# Altium PCB HnWrist.PcbDoc
Units mil, origin at the board's own origin, x right, y up, seen from the top; angles counter-clockwise.
Board outline 1130 x 1625 mil, 2 copper layers (Top Layer, Bottom Layer); 73 components, 55 nets, 292 pads, 87 vias.
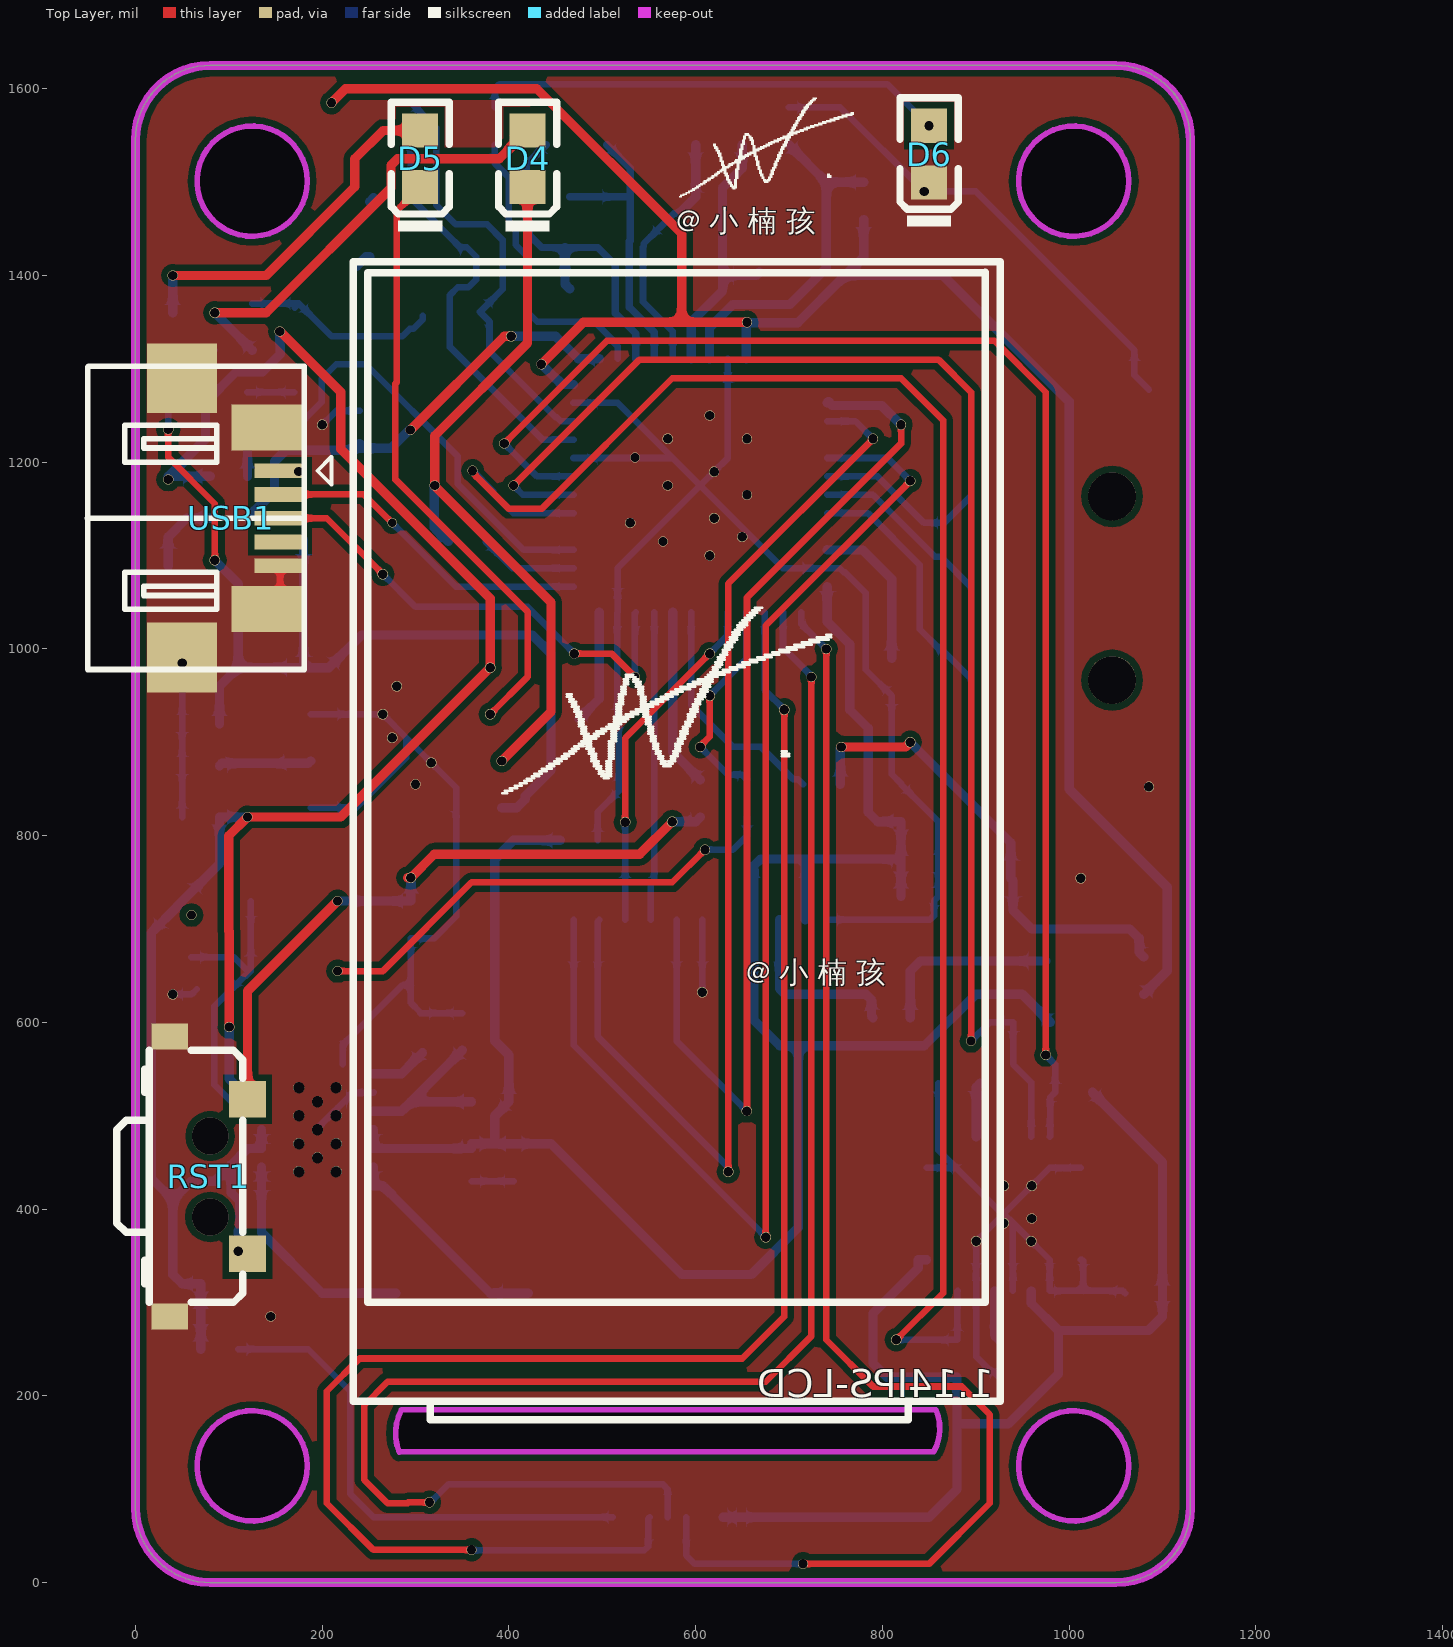
[diagram p0: Top Layer view]
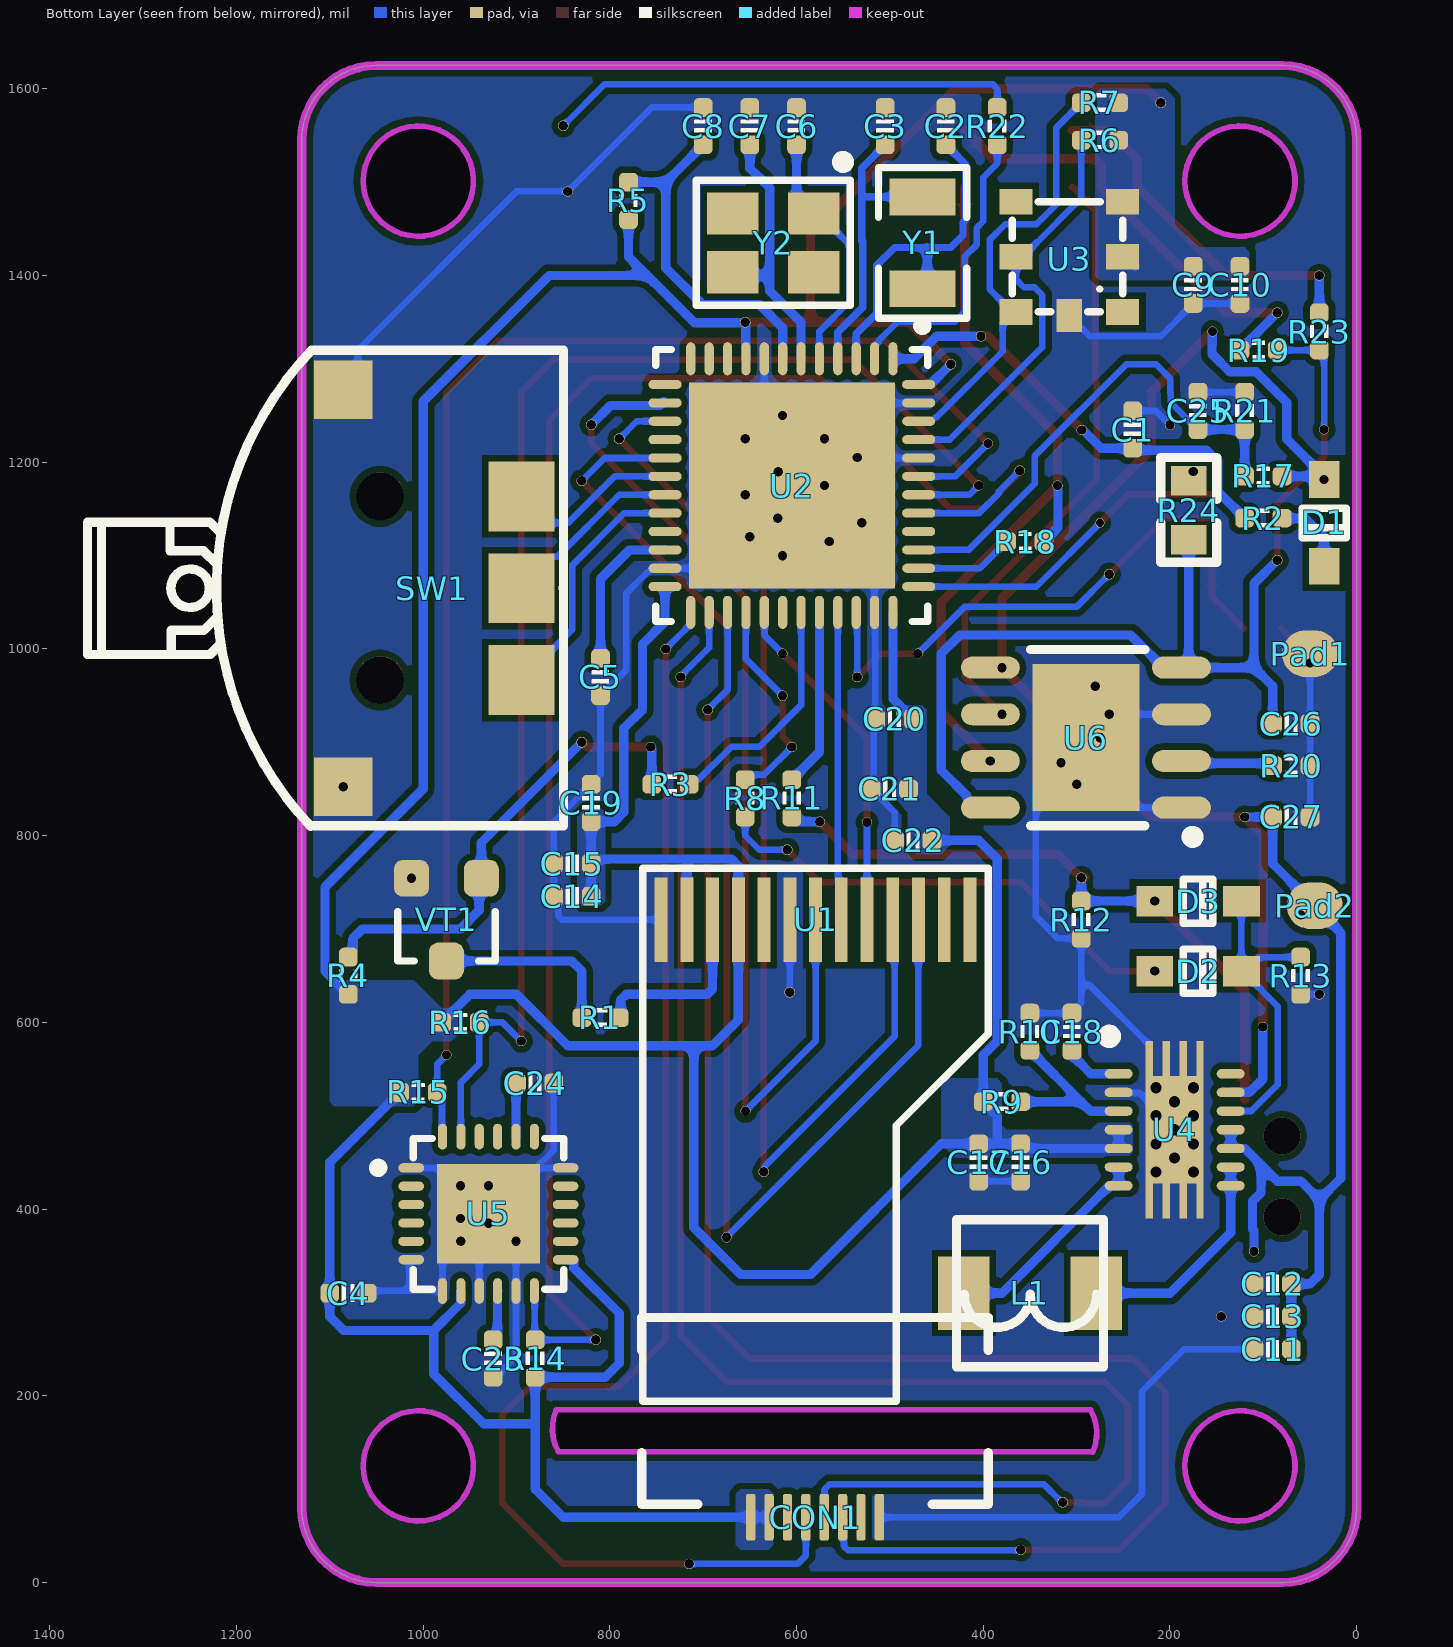
[diagram p1: Bottom Layer view, seen from below]
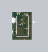
[diagram p2: 3D render of the assembled board from above, using the file's embedded part models]
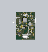
[diagram p3: 3D render of the assembled board from below, using the file's embedded part models]

## Layer stack, top to bottom
Top Solder: solder mask 0.4, Solder Resist, Dk 3.5
Top Layer: signal copper 1.4
Dielectric 1: dielectric 12.6, FR-4, Dk 4.8
Bottom Layer: signal copper 1.4
Bottom Solder: solder mask 0.4, Solder Resist, Dk 3.5

## Board outline
0,80 ccw(c80,80) 80,0 1050,0 ccw(c1050,80) 1130,80 1130,1545 ccw(c1050,1545) 1050,1625 80,1625 ccw(c80,1545) 0,1545
cut-out: 65.94,125 ccw(c125,125) 125,65.94 ccw(c125,125) 184.06,125 ccw(c125,125) 125,184.06 ccw(c125,125)
cut-out: 945.94,1501.06 ccw(c1005,1501.06) 1005,1442.01 ccw(c1005,1501.06) 1064.06,1501.06 ccw(c1005,1501.06) 1005,1560.12 ccw(c1005,1501.06)
cut-out: 125,1442.01 cw(c125,1501.06) 65.94,1501.06 cw(c125,1501.06) 125,1560.12 cw(c125,1501.06) 184.06,1501.06 cw(c125,1501.06)
cut-out: 945.94,125 ccw(c1005,125) 1005,65.94 ccw(c1005,125) 1064.06,125 ccw(c1005,125) 1005,184.06 ccw(c1005,125)
cut-out: 282.63,139.86 cw(c330,160) 285,185 855,185 857.37,185.14 cw(c810,165) 855,140
cut-out: 285,185 857.23,185 857.37,185.14

## Design rules (kind name [scope] priority, off if disabled: settings)
Clearance [All] p1: gap=7 ignorepadtopadclearanceinfootprint=FALSE except(0: Arc-Hole Track-Hole SMDPad-Hole THPad-Hole Via-Hole Fill-Hole Poly-Hole Region-Hole Text-Hole)
HoleSize [All] p1: absolutevalues=TRUE maxlimit=200 minlimit=12 maxpercent=80.000 minpercent=20.000
HoleToHoleClearance [All] p1: gap=12 allowstackedmicrovias=TRUE
MinimumSolderMaskSliver [All] p1: minsoldermaskwidth=12
PlaneConnect [All] p1: planeconnectstyle=Direct reliefexpansion=20 reliefentries=4 reliefconductorwidth=10 reliefairgap=10
PolygonConnect [All] p1: connectstyle=Direct reliefconductorwidth=10 reliefentries=4 polygonreliefangle="90 Angle" airgapwidth=10
RoutingVias [All] p1: holewidth=12 width=13 viastyle="Through Hole" minholewidth=12 minwidth=12 maxholewidth=200 maxwidth=200
SolderMaskExpansion [All] p1: expansion=4 istentingtop=FALSE
Width [All] p1: maxlimit=100 minlimit=7 preferedwidth=8
26 further rules are at their usual default settings.

## Classes and differential pairs
net class GND: GND
net class PWR: 3V3 BAT BAT_CHG BAT_DET USB_VCC

## Components (designator, comment, footprint, x,y, rotation, side; value= is the part's Value field where it differs from the comment)
C1 "104" CAP_0402 240,1235 r270 bottom value=0.1u
C2 "22pF" CAP_0402 440,1560 r270 bottom value=0.1u
C3 "22pF" CAP_0402 505,1560 r270 bottom value=0.1u
C4 "1uF" CAP_0402 1080,310 r0 bottom value=0.1u
C5 "4.7uF" CAP_0402 810,970 r90 bottom value=0.1u
C6 "22pF" CAP_0402 600,1560 r270 bottom value=0.1u
C7 "22pF" CAP_0402 650,1560 r270 bottom value=0.1u
C8 "104" CAP_0402 700,1560 r270 bottom value=0.1u
C9 "4.7uF" CAP_0402 175,1390 r90 bottom value=0.1u
C10 "104" CAP_0402 125,1390 r90 bottom value=0.1u
C11 "106" CAP_0402 90,250 r0 bottom value=0.1u
C12 "106" CAP_0402 90,320 r0 bottom value=0.1u
C13 "106" CAP_0402 90,285 r0 bottom value=0.1u
C14 "106" CAP_0402 840,735 r0 bottom value=0.1u
C15 "22uF" CAP_0402 840,770 r0 bottom value=0.1u
C16 "22uF" CAP_0402 360,450 r270 bottom value=0.1u
C17 "104" CAP_0402 405,450 r270 bottom value=0.1u
C18 "104" CAP_0402 305,590 r270 bottom value=0.1u
C19 "1uF" CAP_0402 820,835 r90 bottom value=0.1u
C20 "1uF" CAP_0402 495,925 r180 bottom value=0.1u
C21 "1uF" CAP_0402 500,850 r180 bottom value=0.1u
C22 "1uF" CAP_0402 475,795 r0 bottom value=0.1u
C23 "104" CAP_0402 925,240 r90 bottom value=0.1u
C24 "2.2nF" CAP_0402 880,535 r0 bottom value=0.1u
C25 "104" CAP_0402 170,1255 r90 bottom value=0.1u
C26 "106" CAP_0402 70,920 r0 bottom value=0.1u
C27 "106" CAP_0402 70,820 r0 bottom value=0.1u
CON1 "MAX30102" FFC_0.5_8 580.16,159 r0 bottom
D1 "1N4148" LC-SOD-323 35,1135 r90 bottom
D2 "1N4148" LC-SOD-323 170,655 r0 bottom
D3 "1N4148" LC-SOD-323 170,730 r0 bottom
D4 "红灯 0603" LC-0603_LED_S1 420,1525 r90 top
D5 "绿灯 0603" LC-0603_LED_S1 305,1525 r90 top
D6 "红灯 0603" LC-0603_LED_S1 850,1530 r90 top
L1 "1.5uH" 变压器电感_0420 350,310 r90 bottom locked
Pad1 "BAT" PAD_A 50,995 r180 bottom
Pad2 "BAT" PAD_A 45,725 r180 bottom
R1 "10R" RES_0402 810,605 r0 bottom value=22R
R2 "10K" RES_0402 100,1140 r180 bottom value=22R
R3 "1K" RES_0402 735,855 r180 bottom value=22R
R4 "20K" RES_0402 1080,650 r270 bottom value=22R
R5 "47K" RES_0402 780,1480 r270 bottom value=22R
R6 "4.7K" RES_0402 275,1545 r180 bottom value=22R
R7 "4.7K" RES_0402 275,1585 r180 bottom value=22R
R8 "4.7K" RES_0402 655,840 r90 bottom value=22R
R9 "1M" RES_0402 380,515 r180 bottom value=22R
R10 "180K" RES_0402 350,590 r90 bottom value=22R
R11 "20K" RES_0402 605,840 r270 bottom value=22R
R12 "20K" RES_0402 295,710 r270 bottom value=22R
R13 "1M" RES_0402 60,650 r270 bottom value=22R
R14 "10K" RES_0402 880,240 r270 bottom value=22R
R15 "10K" RES_0402 1005,525 r0 bottom value=22R
R16 "10K" RES_0402 960,600 r0 bottom value=22R
R17 "20K" RES_0402 100,1185 r0 bottom value=22R
R18 "2K" RES_0402 355,1115 r180 bottom value=22R
R19 "2K" RES_0402 105,1320 r180 bottom value=22R
R20 "2K" RES_0402 70,875 r180 bottom value=22R
R21 "20K" RES_0402 120,1255 r90 bottom value=22R
R22 "1K" RES_0402 385,1560 r90 bottom value=22R
R23 "10K" RES_0402 40,1340 r90 bottom value=22R
R24 "0R" 0603R 180,1180 r270 bottom value=22R
RST1 "KEY" 侧面按键3*6*3.5 80,435 r90 top locked
SW1 "三档拨轮开关" SW-SMD 990,1065 r90 bottom locked
U1 "IPS-LCD" 1.14IPS-LCD 1256.81,446.22 r270 top locked
U2 "STM32F401CCU6" STM-UFQFPN48_N 605,1175 r270 bottom locked
U3 "BMP180" LGA-7 447.68,1321.57 r270 bottom locked
U4 "TPS63020" TPS63020 195,485 r270 bottom locked
U5 "MPU6050" QFN-24 930,395 r180 bottom
U6 "TP4056" LC-SOP-8_EP_150MIL 290,905 r90 bottom
USB1 "Micro-USB" USB-MICRO_A 155,1191 r270 top locked
VT1 "S8050" SMT_TRIODE_NPN 975,710 r0 bottom
Y1 "32.768KHz" "LC-SMD-3215_2P FC - 135" 465,1435 r90 bottom
Y2 "25MHZ" LC-SMD-3225_4P 625,1435 r0 bottom locked

## Footprints (in the part's own frame and the unit in brackets; to place one, negate y for a bottom-side part, rotate by r counter-clockwise, add the part's x,y. Pads: shape width x height; smd on the part's side, far side on the other; paste and mask are expansions set on the pad)
1.14IPS-LCD [mm] "1.14寸IPS-LCD裸屏SPI接口"
  rect 2.3x0.35 smd far side: 1(-6.7,-21.4) 2(-6.7,-20.7) 3(-6.7,-20) 4(-6.7,-19.3) 5(-6.7,-18.6) 6(-6.7,-17.9) 7(-6.7,-17.2) 8(-6.7,-16.5) 9(-6.7,-15.8) 10(-6.7,-15.1) 11(-6.7,-14.4) 12(-6.7,-13.7) 13(-6.7,-13)
  silkscreen extent -24.6,-26 6.9,-8.4
0603R [mm]
  rect 0.8x0.965 smd: 1(0,0) 2(1.6,0)
  silkscreen extent -0.64,-0.76 2.21,0.76, body extent -0.04,-0.41 1.56,0.41, height 0.45
CAP_0402 [mil]
  rrect50% 20x20 smd: 1(-20,0) 2(20,0)
  silkscreen extent -7,-9 7,9, body extent -20,-10 20,10, height 20
FFC_0.5_8 [mil]
  rrect50% 10x50 smd: 1(-68.9,89) 2(-49.21,89) 3(-29.53,89) 4(-9.84,89) 5(9.84,89) 6(29.53,89) 7(49.21,89) 8(68.9,89)
  silkscreen extent -186,-125 186,75, body extent -187,-124 187,87, height 82
LC-0603_LED_S1 [mm]
  rect 0.93x0.98 smd: A(0.77,0) K(-0.77,0)
  silkscreen extent -1.97,-0.79 1.54,0.79, body extent -0.8,-0.4 0.8,0.4, height 0.6
"LC-SMD-3215_2P FC - 135" [mm]
  rect 1x1.8 smd: 1(-1.25,0) 2(1.25,0)
  silkscreen extent -2.05,-1.2 2.05,1.2
LC-SMD-3225_4P [mm]
  rect 1.4x1.15 smd: 1(-1.1,-0.8) 2(1.1,-0.8) 3(1.1,0.8) 4(-1.1,0.8)
  silkscreen extent -2.1,-2.35 2.1,1.7, body extent -1.6,-1.25 1.6,1.25, height 0.61
LC-SOD-323 [mm]
  rect 1x0.83 smd: 1(1.18,0) 2(-1.18,0)
  silkscreen extent -0.4,-0.6 0.4,0.6, body extent -1.35,-0.63 1.35,0.63, height 1.1
LC-SOP-8_EP_150MIL [mm]
  rect 4x2.9 smd: 0(0,0)
  oval 0.6x1.6 smd: 1(-1.905,-2.6) 2(-0.635,-2.6) 3(0.635,-2.6) 4(1.905,-2.6) 5(1.905,2.6) 6(0.635,2.6) 7(-0.635,2.6) 8(-1.905,2.6)
  silkscreen extent -2.85,-3.05 2.4,1.5
LGA-7 [mm] "LGA-7Pin"
  rect 0.7x0.9 smd: 1(-1,5) 2(-2.5,5) 3(-4,5) 4(-4,2.1) 5(-2.5,2.1) 6(-1,2.1)
  rect 0.9x0.7 smd: 7(-0.9,3.55)
  silkscreen extent -4,2 -1,5
PAD_A [mil]
  oval 60x50 smd: 1(0,0)
QFN-24 [mm]
  oval 0.7x0.25 smd: 1(-2.1,1.25) 2(-2.1,0.75) 3(-2.1,0.25) 4(-2.1,-0.25) 5(-2.1,-0.75) 6(-2.1,-1.25) 13(2.1,-1.25) 14(2.1,-0.75) 15(2.1,-0.25) 16(2.1,0.25) 17(2.1,0.75) 18(2.1,1.25)
  oval 0.25x0.7 smd: 7(-1.25,-2.1) 8(-0.75,-2.1) 9(-0.25,-2.1) 10(0.25,-2.1) 11(0.75,-2.1) 12(1.25,-2.1) 19(1.25,2.1) 20(0.75,2.1) 21(0.25,2.1) 22(-0.25,2.1) 23(-0.75,2.1) 24(-1.25,2.1)
  rect 2.8x2.7 smd: ""(0,0)
  silkscreen extent -3.13,-2.05 2.05,2.05, body extent -2.02,-2.02 2.02,2.02, height 0.95
RES_0402 [mil]
  rrect50% 20x20 smd: 1(-20,0) 2(20,0)
  silkscreen extent -6,-10 6,10, body extent -20,-10 20,10, height 14
SMT_TRIODE_NPN [mm]
  rrect50% 0.95x1 smd: 1(-0.95,-1.125) 2(0.95,-1.125) 3(0,1.125)
  silkscreen extent -1.33,-0.22 1.32,1.13, body extent -1.45,-1.4 1.45,1.4, height 1.3
STM-UFQFPN48_N [mm] "QFN, 48-Leads, Body 7.1x7.1mm, Pitch 0.5mm, Thermal Pad 5.6x5.6mm, IPC Medium Density"
  oval 0.9x0.25 smd: 1(-3.45,2.75) 2(-3.45,2.25) 3(-3.45,1.75) 4(-3.45,1.25) 5(-3.45,0.75) 6(-3.45,0.25) 7(-3.45,-0.25) 8(-3.45,-0.75) 9(-3.45,-1.25) 10(-3.45,-1.75) 11(-3.45,-2.25) 12(-3.45,-2.75) 25(3.45,-2.75) 26(3.45,-2.25) 27(3.45,-1.75) 28(3.45,-1.25) 29(3.45,-0.75) 30(3.45,-0.25) 31(3.45,0.25) 32(3.45,0.75) 33(3.45,1.25) 34(3.45,1.75) 35(3.45,2.25) 36(3.45,2.75)
  oval 0.25x0.9 smd: 13(-2.75,-3.45) 14(-2.25,-3.45) 15(-1.75,-3.45) 16(-1.25,-3.45) 17(-0.75,-3.45) 18(-0.25,-3.45) 19(0.25,-3.45) 20(0.75,-3.45) 21(1.25,-3.45) 22(1.75,-3.45) 23(2.25,-3.45) 24(2.75,-3.45) 37(2.75,3.45) 38(2.25,3.45) 39(1.75,3.45) 40(1.25,3.45) 41(0.75,3.45) 42(0.25,3.45) 43(-0.25,3.45) 44(-0.75,3.45) 45(-1.25,3.45) 46(-1.75,3.45) 47(-2.25,3.45) 48(-2.75,3.45)
  rect 5.6x5.6 smd: 49(0,0)
  silkscreen extent -4.47,-3.7 3.7,3.7, body extent -3.55,-3.55 3.55,3.55, height 0.6
SW-SMD [mm]
  rect 1.6x1.6 smd: a(-5.4,2.425) a(5.4,2.425)
  rect 1.9x1.8 smd: b(2.5,-2.425) c(0,-2.425) d(-2.5,-2.425)
  round 1.3 hole 1.3 unplated: ""(-2.5,1.425) ""(2.5,1.425)
  silkscreen extent -6.48,-3.57 6.48,9.39
TPS63020 [mil] "High Efficiency Single Inductor Buck-Boost Converter With 4-A Switches"
  oval 10x30 smd: 1(-60,-60) 2(-40,-60) 3(-20,-60) 4(0,-60) 5(20,-60) 6(40,-60) 7(60,-60) 8(60,60) 9(40,60) 10(20,60) 11(0,60) 12(-20,60) 13(-40,60) 14(-60,60)
  rect 50x7.87 smd: 15(-70,-27.17) 15(-70,-9.06) 15(-70,9.06) 15(-70,27.17) 15(70,-27.17) 15(70,-9.06) 15(70,9.06) 15(70,27.17)
  round 11.81 hole 11.81: 15(-45,-20) 15(-45,20) 15(-30,0) 15(-15,-20) 15(-15,20) 15(0,0) 15(15,-20) 15(15,20) 15(30,0) 15(45,-20) 15(45,20)
  rect 115x62.2 smd: 15(0,0)
  silkscreen extent -105,-75 -95,-65, body extent -85,-65 85,65, height 30
USB-MICRO_A [mm]
  rect 1.9x1.9 smd: 0(-2.515,-2.667) 0(5.08,-2.667)
  rect 0.4x1.4 smd: 1(0,0) 2(0.648,0) 3(1.295,0) 4(1.943,0) 5(2.591,0)
  rect 1.25x2 smd: 5(-1.168,-0.33) 5(3.759,-0.33)
  silkscreen extent -2.84,-5.24 5.41,1.4, body extent -2.71,-5.08 5.25,0.34, height 2.69
侧面按键3*6*3.5 [mm]
  rect 1x1 smd: 1(-2.1,-1.016) 2(2.1,-1.016)
  rect 0.7x1 smd: 4(-3.81,1.1) 5(3.81,1.1)
  silkscreen extent -3.43,-0.89 3.43,2.54, body extent -3.43,-0.89 3.43,1.65, height 4
变压器电感_0420 [mm]
  rect 2x1.4 smd: 1(0,-1.8) 2(0,1.8)
  silkscreen extent -2,-2 2,2

## Part data
C1 C2 C3 C4 C5 C6 C7 C8 C9 C10 C11 C12 C13 C14 C15 C16 C17 C18 C19 C20 C21 C22 C23 C24 C25 C26 C27: library part 电容-0402, "Capacitor"
CON1: library part FFC_0.5_8, System=Connector
D1 D2 D3: library part "SOD-323 1N4148WS T4", "二极管", Package=SOD-323, SuppliersPartNumber=C2128, ComponentLink1Description=供应商链接, ComponentLink1URL=http://www.szlcsc.com/product/details_2485.html, Supplier=LC
D4 D6: library part "0603 红灯", "发光二极管", Package=0603, SuppliersPartNumber=C2286, ComponentLink1Description=供应商链接, ComponentLink1URL=http://www.szlcsc.com/product/details_2659.html, Supplier=LC
D5: library part "0603 绿灯", "发光二极管", Package=0603, SuppliersPartNumber=C72043, ComponentLink1Description=供应商链接, ComponentLink1URL=http://www.szlcsc.com/product/details_73152.html, Supplier=LC
L1: library part "Inductor Iron 2", _Current=10A, _Accuracy=20%, _Comma=,, _Footprint=1040, _Name=IND, _Specification=IND,1040,1.5uH,10A,20%, _Value=1.5uH
Pad1 Pad2: library part Pad, _Comma=,, _Funcyusa=Test, _Name=Pad, _Remarks=BAT, _Specification=Pad,Test,BAT
R1 R2 R3 R4 R5 R6 R7 R8 R9 R10 R11 R12 R13 R14 R15 R16 R17 R18 R19 R20 R21 R22 R23 R24: library part 电阻-0402, "Resistor"
RST1: library part SW-PB, "按键"
SW1: library part 拨轮开关, "拨轮开关", BOM_JLCPCB Part Class="Extended Part", BOM_Manufacturer="XKB Enterprise", BOM_Manufacturer Part=TM-2022-3, BOM_Supplier=LCSC, BOM_Supplier Part=C318952, Contributor=LCSC, spicePre=S, spiceSymbolName=TM-2022-3
U1: library part IPS-LCD-1.14, "IPS-LCD-1.14寸裸屏spi接口"
U2: "ARM Cortex-M4 32-bit MCU+FPU, 105 DMIPS, 256 kB Flash, 64 kB Internal RAM, 36 I/Os, 48-pin UFQFPN, -40 to 85 degC, Tray", I/Os (High Current)=36, Manufacturer=STMicroelectronics, Operating Frequency(F) (Processor speed) (MHz)=84, Supplier Part Number 1=19X6217, Supply Voltage(Vcc) max (V)=3.6, Supply Voltage(Vcc) min (V)=1.8, ComponentLink1Description="Manufacturer URL", ComponentLink1URL=http://www.st.com/web/en/home.html, ComponentLink2Description=Datasheet, ComponentLink2URL=http://www.st.com/st-web-ui/static/active/en/resource/technical/document/data_brief/DM00071938.pdf, ComponentLink3Description="Package Specification", ComponentLink3URL=http://www.st.com/st-web-ui/static/active/en/resource/technical/document/data_brief/DM00071938.pdf, Core="ARM Cortex-M4", DatasheetVersion="Rev. 1", FLASH Size (Prog) (kB)=256, Internal RAM Size (kB)=64, Mounting Technology="Surface Mount", PackageDescription="48-Pin Ultra Thin Fine Pitch Quad Flat No-Lead, 7 x 7 x 0.6 mm Body, 0.5 mm Pitch, Exposed Pad", PackageReference=UFQFPN48, PackageVersion="Rev. 1, 04/2013", Packing=Tray, PartNumber=STM32F401CCU6, Supplier 1=Newark, Supplier 2=Mouser, Supplier Part Number 2=511-STM32F401CCU6
U3: "数字气压传感器"
U5: "六轴传感器"
U6: "电池电源管理", Package=SOP-8_EP_150mil, SuppliersPartNumber=C16581, ComponentLink1Description=供应商链接, ComponentLink1URL=http://www.szlcsc.com/product/details_17264.html, Supplier=LC
VT1: library part SMT_TRIODE_NPN, "Surface mount NPN transistor, package SOT-23"
Y1: library part "SMD-3215_2P 32.768KHz 20ppm 12.5pF", "贴片晶振", Package=SMD-3215_2P, SuppliersPartNumber=C32346, ComponentLink1Description=供应商链接, ComponentLink1URL=http://www.szlcsc.com/product/details_33310.html, Supplier=LC
Y2: library part "SMD-3225_4P  25MHZ 12PF 10PPM", "贴片晶振", Package=SMD-3225_4P, SuppliersPartNumber=C9006, ComponentLink1Description=供应商链接, ComponentLink1URL=http://www.szlcsc.com/product/details_9526.html, Supplier=LC

## Via types
v1: diameter 11, hole 10, Top Layer to Bottom Layer, 84 vias
v2: diameter 39.37, hole 39.37, Top Layer to Bottom Layer, 2 vias
v3: diameter 10, hole 9, Top Layer to Bottom Layer, 1 vias

## Nets (pads, with @x,y where several pads share a name; then routed paths per layer and width w, separated by ;. In a path a pad name is that pad's centre, name@x,y a point inside that pad or via, vN(x,y) a via of type N, cw(c..) or ccw(c..) an arc to the next point about the centre after c; other vN are vias at no path point)
3V3: C4.2 C9.2 C10.2 C14.1 C15.1 C16.1 C17.1 C19.1 C20.2 C21.2 C22.1 CON1.7 CON1.8 R4.2 R5.2 R6.2 R7.2 R9.1 R14.2 R15.2 R16.2 U1.10 U1.12 U2.9 U2.24 U2.36 U2.48 U3.2 U3.3 U4.4 U4.5 U5.8 U5.13 | length 5711.8
  Top Layer w10: v1(210,1585) 225,1600 429.88,1600 585,1444.88 585,1350 ; v1(434.8,1305) 479.8,1350 585,1350 ; v1(655,1350) 585,1350
  Bottom Layer w10: U3.2@236.89,1410 246.89,1420 U3.2 ; U3.3 U3.3@255,1483.23 ; U4.4 U4.5 C16.1@360,465 ; C16.1 382.5,470 ; v1(434.8,1305) 456.54,1283.27 U2.48 ; C22.1 405,795 385,775 385,580 400,565 R9.1 385,500 385,472.5 382.5,470 ; C20.2 496.73,946.73 U2.36 ; CON1.7 CON1.8 850,70 880,100 880,170 ; U2.9 654.29,1310.91 654.29,1349.02 v1@655.27,1350 ; v1(655,1350) v1@655.27,1350 ; U1.12 717.44,769.14 711.58,775 ; U2.24 740.83,1029.27 765,1005.1 765,935 785,915 785,825 795,815 C19.1 C15.1 ; R5.2 780,1420 760,1400 ; C14.1 C15.1 ; U5.13 838.62,345.79 838.54,345.71 838.54,337.01 790,288.46 790,235 805,220 R14.2 880,170 ; U5.8 959.61,312.24 959.61,299.14 988.75,270 ; R16.2 950,630 900,630 845,575 710,575 ; R15.2 1100,450 C4.2 1100,285 1085,270 988.75,270 ; R4.2 1105,655 1105,745 1000,850 1000,1265 865,1400 760,1400 ; 382.5,470 C17.1 445,470 585,330 659.75,330 710,380.25 710,575 ; v1@655.27,1350 655.91,1349.36 709.36,1349.36 760,1400 ; 710,575 690,575 662.32,602.68 U1.10 662.32,767.68 669.65,775 711.58,775 ; 711.58,775 815,775 C15.1 ; 880,170 935,170 988.75,223.75 988.75,270
BAT: C11.1 C12.1 C13.1 C27.2 D1.1 Pad2.1 R17.1 RST1.1 U4.10 U4.11 U4.13 U6.5 | length 2290.6
  Top Layer w10: v1(100.5,595) 100.5,697.39 100,697.89 100,800 v1(120,820) 220,820 v1(380,980) 380,1054.04 219.86,1214.19 219.86,1275.14 155,1340 v1(154.5,1340)
  Bottom Layer w10: D1.1@46.34,1192.8 D1.1@38.54,1185 ; C11.1 C13.1 C12.1 50,320 40,330 40,410 ; R17.1 D1.1@38.54,1185 ; v1(100.5,595) 100.5,539.5 115,525 U4.13 ; v1(110,355) 110,376.88 111.69,378.57 111.69,408.44 102.5,417.63 102.5,447.5 ; v1(120,820) C27.2 90,770 Pad2.1 45,724.14 17,696.14 17,433 40,410 ; U4.11 U4.10 120,465 102.5,447.5 ; v1(154.5,1340) 154.69,1339.81 154.69,1326.27 155,1325.96 155,1315.96 136.04,1297 107.96,1297 75,1264.04 75,1224.8 35,1184.8 v1(35,1181.46) D1.1@38.54,1185 ; 40,410 60,430 85,430 102.5,447.5
  other v1: 60,715
BAT_CHG: R18.1 U2.38 | length 106
  Bottom Layer w7: R18.1 403.58,1086.42 U2.38
BAT_DET: C25.1 R17.2 R21.1 U2.39 | length 542.6
  Bottom Layer w7: C25.1 190,1255 199.29,1264.29 199.29,1274.29 199.5,1274.5 199.5,1289.5 215,1305 246.63,1305 345,1206.63 345,1176.92 415.82,1106.1 U2.39
  Bottom Layer w10: R17.2 R21.1 C25.1
BMP180_SCL: R6.1 U2.45 U3.5 | length 446.7
  Bottom Layer w7: R6.1 295,1482.91 347.63,1430.28 354.72,1430.28 U3.5 365,1395.72 356.68,1387.4 345.11,1387.4 336.78,1379.07 336.78,1323.42 435.99,1224.21 U2.45
BMP180_SDA: R7.1 U2.46 U3.6 | length 461.8
  Bottom Layer w7: R7.1 321.96,1558.04 321.96,1475.75 342.93,1454.78 376.57,1454.78 393.22,1438.13 393.22,1385.22 368.94,1360.94 379.22,1350.67 379.22,1318.93 449.99,1248.16 451.34,1248.16 455.61,1243.9 U2.46
CPOUT: C24.2 U5.20 | length 59.2
  Bottom Layer w10: U5.20 900.55,477.76 900.55,530.55 C24.2@905,535
EN: R11.1 U2.32 | length 191.4
  Bottom Layer w10: U2.32 575.47,889.53 R11.1
GND: C1.1 C2.1 C3.1 C4.1 C5.1 C6.1 C7.1 C8.1 C9.1 C10.1 C11.2 C12.2 C13.2 C14.2 C15.2 C16.2 C17.2 C18.1 C19.2 C20.1 C21.1 C22.2 C23.1 C24.1 C25.2 C26.1 C27.1 CON1.1 D6.K Pad1.1 R10.2 R12.2 R13.2 R20.2 R21.2 RST1.4 RST1.5 SW1.a U1.8 U1.13 U2.8 U2.23 U2.35 U2.44 U2.47 U2.49 U3.7 U4.2 U4.15 U5. U5.1 U5.6 U5.7 U5.9 U5.11 U5.18 U6.0 U6.1 U6.3 USB1.0 USB1.5 VT1.2 | length 5057.6
  Top Layer w7: USB1.0@50,991 USB1.0@80.89,1021.89 ; USB1.5@120.89,1021.89 142,1043 155,1056 USB1.5@155,1089
  Bottom Layer w7: v1(40,630) R13.2 R13.2@65.57,635.57 ; C27.1 R20.2 C26.1 v1(50,985) Pad1.1 ; C11.2 185,250 230,205 230,95 255,70 CON1.1 ; R21.2 C25.2 ; C10.1 C9.1 ; C9.1@170.5,1365.5 C9.1 ; U6.1 236.41,830 290,883.59 U6.0 ; U6.3 v1(265,930) U6.0 ; U4.15@195,485 195,486.8 232.63,524.43 254.43,524.43 U4.2 ; v1(200,1240) 215,1255 C1.1 ; U4.15@222.17,555 222.17,576.06 286.1,640 295,640 ; U3.7 307.91,1353.07 297.63,1342.79 293.7,1342.79 285.91,1335 210,1335 C9.1 ; R10.2 C18.1 305,610.81 295,620.81 295,640 ; C16.2 C17.2 ; U2.44 U2.49@575.47,1204.53 ; U2.47 516.42,1263.58 U2.49@575.47,1204.53 ; C22.2 495,825 C21.1@517.5,847.5 ; C21.1 C21.1@517.5,847.5 ; v1(607.2,632.2) U1.8 ; U2.8 634.53,1204.53 v1(619.76,1189.76) U2.49 ; C8.1 755,1580 v1(845,1490) 900,1490 1070,1320 1070,1293.07 SW1.a@1085.47,1277.6 ; U1.13 850.9,710 855.4,714.5 855.4,730.4 C14.2 C15.2 860,815 C19.2 820,855.81 810,865.81 C5.1 782.22,977.78 782.22,1059.95 760.01,1082.15 758.66,1082.15 754.39,1086.42 U2.23 693.58,1086.42 U2.49 ; U5.18 U5.@878.82,444.21 ; C24.1 860,463.03 U5.@878.82,444.21 ; 900.47,275.38 U5.11 v1(900.47,365.47) U5. ; 900.5,275.35 900.5,242 916.93,225.57 919.43,225.57 C23.1 ; U5.9 U5.@939.84,385.16 ; U5.6 1013.69,345.79 1015,344.47 1015,312.32 ; U5.1 979.21,444.21 U5. ; C4.1 1057.68,312.32 1015,312.32 ; U6.0 343.59,851.41 343.59,713.59 320,690 R12.2 295,640 ; C21.1@517.5,847.5 517.5,922.5 C20.1 515.87,925.87 515.87,1038.63 U2.35 516.42,1086.42 U2.49 ; U2.49@575.47,1204.53 U2.49 ; U5.@878.82,444.21 928.03,395 U5. ; U5. U5.@939.84,385.16 ; U5.@939.84,385.16 979.21,345.79 U5.7 1015,312.32
  other v1: 145,285 959.53,365.47 930,385 960,390 930,425 960,425 1012.4,754.29 1085.47,852.4 300,855 316.79,878.21 275,905 280,960 615,1100 565,1115 650,1120 530,1135 620,1140 655,1165 570,1175 535,1205 570,1225 655,1225 615,1250
KEY1: SW1.b U2.18 | length 186.1
  Bottom Layer w7: U2.18 794.9,1184.84 844.75,1135 866.11,1135 SW1.b
KEY2: SW1.c U2.19 | length 196.3
  Bottom Layer w7: U2.19 789.84,1165.16 856.1,1098.9 862.6,1098.9 894.53,1066.97 SW1.c
KEY3: SW1.d U2.20 | length 269.3
  Bottom Layer w7: U2.20 784.53,1145.47 840,1090 840,1021.11 860.63,1000.48 862.6,1000.48 894.53,968.54 SW1.d
LED: R22.1 U2.2 | length 320.3
  Bottom Layer w7: R22.1 385,1520 400,1505 400,1458.03 407.22,1450.82 407.22,1432.78 420,1420 420,1410.75 419.07,1409.82 419.07,1361.75 430.32,1350.5 491.66,1350.5 512.15,1330.01 512.15,1328.66 516.42,1324.39 U2.2
MAX30102_INT: CON1.3 U2.27 | length 1804.8
  Top Layer w7: v1(360,35) 255,35 205,85 205,205 240,240 650,240 695,285 v1(695,935)
  Bottom Layer w7: v1(360,35) 360.5,34.5 545.03,34.5 549.13,38.6 549.13,68.5 CON1.3 ; U2.27 673.9,956.1 v1(695,935)
MAX30102_SCL: CON1.5 U2.25 | length 1490
  Top Layer w7: v1(715,20) 850,20 915,85 915,180 885,210 790,210 740,260 v1(740,1000)
  Bottom Layer w7: CON1.5 590,29.1 599.1,20 v1(715,20) ; U2.25 713.27,1026.73 v1(740,1000)
MAX30102_SDA: CON1.4 U2.26 | length 1753.7
  Top Layer w7: v1(315,86) 292.46,86 291.46,85 270,85 245,110 245,190 270,215 675,215 724,264 v1(724,970)
  Bottom Layer w7: v1(315,86) 316,86 335.5,105.5 564.5,105.5 570,100 570,70.32 CON1.4 ; U2.26 693.58,1001.42 724,971 v1(724,970)
MPU6050_INT: R14.1 U2.41 U5.12 | length 1850.4
  Top Layer w7: v1(361.02,1191.02) 361.02,1189.94 363.02,1187.94 363.02,1186.98 400,1150 435,1150 575,1290 820,1290 865,1245 865,310 v1(815,260)
  Bottom Layer w7: v1(361.02,1191.02) 383.16,1168.89 383.16,1166.84 404.53,1145.47 U2.41 ; v1(815,260) R14.1 880.39,260.39 880.39,311.93 U5.12
MPU6050_SCL: R16.1 U2.42 U5.23 | length 1507.4
  Top Layer w7: v1(405,1175) 540,1310 860,1310 895,1275 v1(895,580)
  Bottom Layer w7: v1(405,1175) 414.84,1165.16 U2.42 ; v1(895,580) 915,600 R16.1 940,555.22 959.53,535.7 U5.23
MPU6050_SDA: R15.1 U2.43 U5.24 | length 1540.9
  Top Layer w7: v1(395,1220) 505,1330 920,1330 975,1275 v1(975,565)
  Bottom Layer w7: v1(395,1220) 430.16,1184.84 U2.43 ; v1(975,565) 985,555 R15.1 979.76,519.76 979.76,478.22 U5.24
NetC1_2: C1.2 R2.1 U2.1 | length 492.9
  Top Layer w10: v1(294.5,1234.5) 395,1335 v1(402.5,1335)
  Bottom Layer w10: R2.1 149,1169 149,1200.72 161.29,1213 235,1213 235,1215 240,1220 C1.2@242.5,1217.5 ; C1.2 273.73,1215 293.04,1234.31 294.31,1234.31 v1(294.5,1234.5) ; v1(402.5,1335) 450,1335 474.17,1310.83 U2.1
NetC18_2: C18.2 U4.1 | length 61.8
  Bottom Layer w10: U4.1 285,545 C18.2@307.5,567.5
NetD1_2: D1.2 R2.2 | length 84.7
  Bottom Layer w10: D1.2 35,1120 55,1140 R2.2
NetD2_1: D2.1 R8.1 | length 518.6
  Top Layer w7: v1(216.46,655) 265,655 360,750 575,750 v1(610,785)
  Bottom Layer w7: v1(610,785) 640,785 655,800 R8.1
NetD2_2: D2.2 D3.2 R13.1 U4.12 | length 346.3
  Bottom Layer w7: R13.1 105.2,670 120.2,655 D2.2 ; D3.2 D2.2 ; U4.12@134.43,505.57 U4.12 112.98,505 84.5,533.48 84.5,617.16 117.34,650 118.54,650 D2.2
NetD3_1: D3.1 R11.2 R12.1 RST1.2 | length 696.3
  Top Layer w10: RST1.2 120,633.54 v1(216.46,730) ; v1@291.52,754.81 294.81,754.81 v1(295,755) 320,780 540,780 v1(575,815)
  Bottom Layer w10: v1(216.46,730) R12.1 v1(295,755) ; v1(575,815) 600,815 R11.2
NetD4_A: D4.A R19.1 | length 486.7
  Top Layer w10: v1(85,1360) 140,1360 273.71,1493.71 273.71,1517.96 280.74,1524.99 329.25,1524.99 389.68,1525 D4.A
  Bottom Layer w10: v1(85,1360) R19.1
NetD4_K: D4.K R18.2 U6.7 | length 795.7
  Top Layer w10: v1(392.36,880) 445,932.64 445,1050 320.5,1174.5 320.5,1228.25 420,1327.75 D4.K
  Bottom Layer w10: v1(320.5,1175) 320.5,1174.73 320,1174.23 320,1130 R18.2
NetD5_A: D5.A R23.2 | length 386.9
  Top Layer w10: v1(40,1400) 140,1400 235,1495 235,1525 265.32,1555.32 D5.A
  Bottom Layer w10: R23.2 v1(40,1400)
NetD5_K: D5.K U6.6 | length 651.4
  Top Layer w7: D5.K 304.02,1494.69 289.21,1479.88 289.21,1478.89 280,1469.69 280,1285.75 278.5,1284.25 278.5,1181.5 420,1040 420,970 v1(380,930)
NetD6_A: D6.A R22.2 | length 505.6
  Bottom Layer w7: R22.2 385,1600 390,1605 805.32,1605 v1(850,1560.32)
NetL1_1: L1.1 U4.8 U4.9 | length 241.1
  Bottom Layer w10: U4.9 U4.8 135,375 200,310 L1.1
NetL1_2: L1.2 U4.6 U4.7 | length 233.5
  Bottom Layer w10: U4.6 U4.7 265,425 380,310 L1.2
NetR1_2: R1.2 VT1.3 | length 200.4
  Bottom Layer w7: VT1.3@975,664.72 VT1.3
  Bottom Layer w10: R1.2 830,655 840.71,665.71 VT1.3
NetR3_1: R3.1 R4.1 VT1.1 | length 511.5
  Top Layer w10: v1(756,895) 824.73,895 829.73,900 v1(830,900)
  Bottom Layer w10: R3.1 755,893.73 756,894.73 v1(756,895) ; v1(830,900) 937.6,792.4 VT1.1 940,751.89 940,720 960,700 1065,700 1075,690 1075,675 R4.1
NetR9_2: R9.2 R10.1 U4.3 | length 186.9
  Bottom Layer w10: U4.3 285,505 295,515 ; R10.1 295,515 ; R9.2 295,515
NetR20_1: R20.1 U6.2 | length 99.7
  Bottom Layer w10: R20.1 92.5,877.5 185.14,877.5 U6.2
NetR24_1: R24.1 USB1.1
  other v1: 175,1190
OSC32_IN: C2.2 U2.3 Y1.1 | length 368.2
  Bottom Layer w8: C2.2 418.57,1518.57 418.57,1459.97 421.72,1456.82 421.72,1443.28 435,1430 460,1430 495,1430 514.13,1410.87 514.13,1359.65 536.1,1337.68 U2.3
  Bottom Layer w10: 460,1430 460,1390.79 Y1.1
OSC32_OUT: C3.2 U2.4 Y1.2 | length 316.3
  Bottom Layer w8: Y1.2 529.21,1484.21 530,1485 ; C3.2 530,1515 530,1485 ; U2.4 555.79,1339.21 529.13,1365.87 529.13,1436.5 530,1437.36 530,1485
OSC_IN: C6.2 U2.5 Y2.1 | length 269
  Bottom Layer w7: U2.5 575.47,1340.03 543.63,1371.87 543.63,1430.49 544.5,1431.36 544.5,1434.22 576.77,1466.5 Y2.1
  Bottom Layer w10: Y2.1 582.36,1466.5 600,1484.13 C6.2
OSC_OUT: C7.2 U2.6 Y2.3 | length 293.1
  Bottom Layer w10: U2.6 595.16,1349.8 628.75,1383.39 628.75,1400 ; C7.2 650,1515 639.55,1504.55 639.2,1504.55 628.75,1494.1 628.75,1400 ; Y2.3 664.8,1400 628.75,1400
Power_ON: R8.2 U2.28 | length 229.1
  Top Layer w7: v1(605,895) 605,896.08 615,906.08 v1(615,950)
  Bottom Layer w7: v1(605,895) 634.5,865.5 649.5,865.5 R8.2 ; v1(615,950) 654.21,989.21 U2.28
REGOUT: C23.2 U5.10 | length 54.3
  Bottom Layer w10: U5.10 920.24,312.24 920.24,264.76 C23.2
RST: C8.2 R5.1 U2.7 | length 373.4
  Bottom Layer w10: U2.7 614.92,1310.91 614.92,1344.14 639.65,1368.87 651.24,1368.87 700.84,1368.87 740,1408.03 740,1500 ; C8.2 740,1500 ; R5.1 740,1500
SWCLK: U2.37 USB1.2 | length 355.1
  Top Layer w7: USB1.2 244.5,1165.5 v3(275,1135)
  Bottom Layer w7: v3(275,1135) 343.27,1066.73 U2.37
SWDIO: U2.34 USB1.3 | length 520
  Top Layer w7: USB1.3 205,1140 v1(265,1080) ; v1(470,995) 510,995 v1(535,970)
  Bottom Layer w7: v1(265,1080) 300,1045 420,1045 v1(470,995) ; v1(535,970) 535,1038.07 U2.34
TFT_BLK: R3.2 U2.31 | length 254.3
  Bottom Layer w7: U2.31 595.16,939.84 640,895 670,895 704.43,860.57 709.43,860.57 R3.2
TFT_CS: U1.7 U2.14 | length 1127
  Top Layer w7: v1@655,507.89 655,1055 820,1220 v1(820,1240)
  Bottom Layer w7: U1.7 579.65,580 v1(654.65,505) v1@655,505
  Bottom Layer w10: U2.14 742.24,1265 746.43,1260.82 799.18,1260.82 v1(820,1240)
TFT_DC: U1.5 U2.29 | length 375.4
  Top Layer w7: v1(524.53,814.53) 524.53,904.53 v1(615,995)
  Bottom Layer w7: U1.5 v1(524.53,814.53) v1@525,815 ; v1(615,995) 634.27,1014.27 634.27,1038.91 U2.29
TFT_LEDK: R1.1 U1.11 | length 197.2
  Bottom Layer w10: U1.11 689.88,650.12 690,650 690,635.86 695.86,630 782.5,630 788.36,624.14 788.36,606.64 R1.1
TFT_RES: U1.6 U2.33 | length 330.7
  Bottom Layer w7: U1.6 552.09,748.39 555.79,752.09 U2.33
TFT_SCL: U1.4 U2.15 | length 1235
  Top Layer w7: v1(635,440) 635,1070 v1(790,1225)
  Bottom Layer w7: U1.4 495,708.03 495,585 634.23,445.77 634.23,440.77 v1(635,440) ; U2.15 771.1,1243.9 v1(790,1225)
TFT_SDA: U1.3 U2.17 | length 1398.7
  Top Layer w7: v1(675,370) 675,1025 v1(830,1180)
  Bottom Layer w7: U1.3 469.41,575.59 v1(675,370) ; U2.17 805.47,1204.53 v1(830,1180)
USB_VCC: C26.2 R19.2 R23.1 R24.2 U6.4 U6.8 | length 1180
  Top Layer w7: v1(35,1235) 35,1205.5 85,1155.5 v1(85,1095)
  Bottom Layer w7: v1(35,1235) 35,1315 R23.1 R19.2
  Bottom Layer w10: v1(85,1095) 110,1070 110,980 ; C26.2 90,960 110,980 ; R24.2 180,986.29 U6.4@186.29,980 ; U6.8 408.36,830 417.48,839.12 417.48,842.48 445,870 445,995 425,1015 242.32,1015 207.32,980 U6.4 U6.4@186.29,980 ; 110,980 U6.4@186.29,980
VCAP_1: C5.2 U2.22 | length 167.1
  Bottom Layer w10: U2.22 740.91,1106.02 778.98,1106.02 810,1075 C5.2
pads on no net: CON1.2 CON1.6 SW1. U1.1 U1.2 U1.9 U2.10 U2.11 U2.12 U2.13 U2.16 U2.21 U2.30 U2.40 U3.1 U3.4 U4.14 U5.2 U5.3 U5.4 U5.5 U5.14 U5.15 U5.16 U5.17 U5.19 U5.21 U5.22 USB1.4 Y2.2 Y2.4
copper on no net:
  other v2: 80,391.69 80,478.31

## Polygon pours and split planes (outlines as drawn)
GND on Top Layer "GND_L01_P051" (solid, remove dead copper, pour order 51): -150,1415 -150,1545 -55,1675 1265,1675 1370,1570 1370,15 1230,-125 -60,-125 -165,-20
no net on Top Layer "NONET_L01_P035" (solid, pour order 35): -140,1675
no net on Top Layer "NONET_L01_P002" (solid, pour order 2): -495,-220
GND on Bottom Layer "GND_L02_P050" (solid, remove dead copper, pour order 50): -165,1445 -165,1575 -20,1720 1225,1720 1390,1555 1390,-70 1260,-200 -30,-200 -170,-60
3V3 on Bottom Layer "3V3_L02_P047" (solid, pour order 47): 630,35 625,40 625,95 630,100 660,100 665,95 665,40 660,35
GND on Bottom Layer "GND_L02_P046" (solid, remove dead copper, pour order 46): -203.31,101605.69 -65,101744 1480,101744 1585,101639 1585,100004 1395,99814 5,99814 -155,99974
3V3 on Bottom Layer "3V3_L02_P045" (solid, pour order 45): 805,825 810,830 825,830 835,820 835,730 830,725 810,725 805,730
3V3 on Bottom Layer "3V3_L02_P044" (solid, pour order 44): 240,490 240,460 245,455 430,455 445,470 445,535 440,540 385,540 380,535 380,490 375,485 285,485 275,495 245,495
3V3 on Bottom Layer "3V3_L02_P015" (solid, pour order 15): 480.79,939.89 495.79,924.89 495.79,839.89 480.79,824.89 480.79,789.89 470.79,779.89 445.79,779.89 435.79,789.89 435.79,819.89 460.79,844.89 460.79,934.89 465.79,939.89
3V3 on Bottom Layer "3V3_L02_P023" (solid, pour order 23): 960,610 960,590 970,580 990,580 1005,565 1005,515 1010,510 1095,510 1100,515 1100,640 1095,645 1010,645 980,615 965,615
GND on Bottom Layer "GND_L02_P013" (solid, pour order 13): 90,325 100,335 130,335 160,305 160,250 135,225 105,225 90,240
no net on Bottom Layer "NONET_L02_P033" (solid, pour order 33): -80,1655
3V3 on Bottom Layer "3V3_L02_P024" (solid, pour order 24): 115,1400 120,1395 275,1395 280,1400 280,1595 275,1600 205,1600 195,1590 195,1455 170,1430 120,1430 115,1425 115,1420
no net on Bottom Layer "NONET_L02_P025" (solid, pour order 25): 5,1630

## Keep-outs
Keep-Out Layer:
  circle w6: c1005,1501.06 r59.06
  circle w6: c125,125 r59.06
  circle w6: c125,1501.06 r59.06
  circle w6: c1005,125 r59.06
  lines w6: 282.63,139.86 cw(c330,160) 285,185 855,185 ; 282.96,140 855,140 ccw(c810,165) 857.37,185.14
  lines w10: 0,80 ccw(c80,80) 80,0 1050,0 ccw(c1050,80) 1130,80 1130,1545 ccw(c1050,1545) 1050,1625 80,1625 ccw(c80,1545) 0,1545 0,80

## Silkscreen, mask and mechanical layers (free items; w line width, h text height)
Top Overlay:
  drawing of 446 lines, arcs and shapes, not listed
  text "@ 小 楠 孩" at 580,1440 h39.37
  text "@ 小 楠 孩" at 655,635 h39.37
Mechanical 1:
  lines w10: -90,0 80,0 ; 0,-125 0,80

## Dimensions
0,1545 to 1130,1545 on Mechanical 1
1050,1625 to 1050,0 on Mechanical 1

## Text inside footprints (layer, text, board x,y; h text height)
U1: Top Overlay "1.14IPS-LCD" at 919.33,198.76 h30